# EAGLE board main (EAGLE 7.2.0)
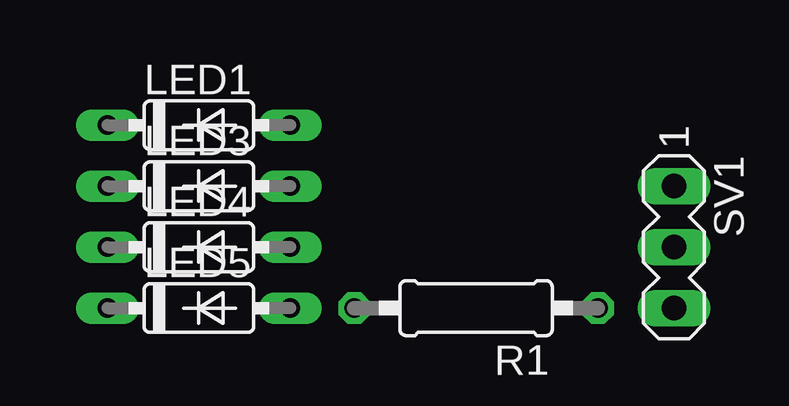
[diagram p0: board, top side]
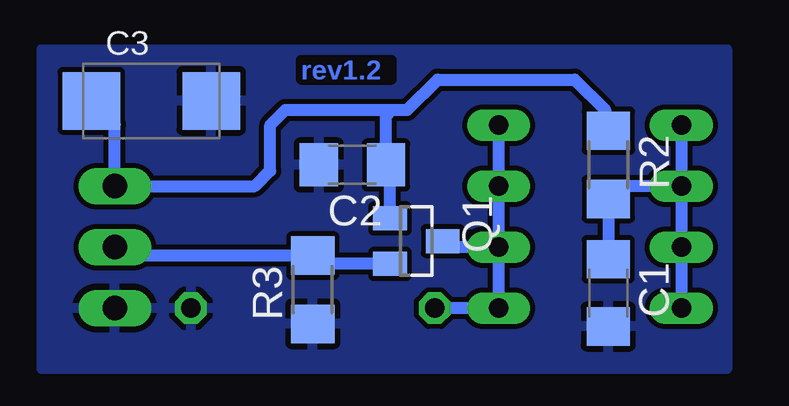
[diagram p1: board, bottom side, seen from below]

No outline drawn. Coordinates in mm, seen from the top.
Copper layers (1*16): Top 0.035mm / dielectric 1.5mm / Bottom 0.035mm
Design rules "default": minimum track width 10mil, minimum drill 24mil, track to track 8mil, track to pad 8mil, pad to pad 8mil, via to via 8mil, smd to smd 8mil, copper to edge 40mil, drill to drill 8mil, minimum pad ring 10mil, minimum via ring 8mil, stop-mask expansion 4mil, vias tented up to drill 0mil, thermal gap 10mil
Net classes: 0 default: width 0.508 mm

## Footprints (pad centres in the part's own frame; a part is rotated, then mirrored left to right if it is on the bottom)
C1206 = smd 1.6 x 1.8: 1 -1.4,0; 2 1.4,0
SMC_C = smd 2.4 x 2.4: + -2.5,0; - 2.5,0
DO35-7 = drill 0.813 long: A 3.81,0; C -3.81,0
SOT23 = smd 1 x 1.4: 1 -0.95,-1.1; 2 0.95,-1.1; 3 0,1.1
0207/10 = drill 0.813 octagon: 1 -5.08,0; 2 5.08,0
R1206 = smd 1.6 x 1.803: 1 -1.422,0; 2 1.422,0
MA03-1 = drill 1.016 long: 1 -2.54,0; 2 0,0; 3 2.54,0

## Placement (x,y rotation side)
C1  100n  [C1206]  7.49,54.61 270 bottom
C2  100n  [C1206]  18.16,59.94 180 bottom
C3  100u  [SMC_C]  26.54,62.61 0 bottom
LED1  1N4148  [DO35-7]  8.26,61.59 0 top
LED3  1N4148  [DO35-7]  8.26,59.05 0 top
LED4  1N4148  [DO35-7]  8.26,56.52 0 top
LED5  1N4148  [DO35-7]  8.26,53.98 0 top
Q1  J111  [SOT23]  15.49,56.77 270 bottom
R1  10M  [0207/10]  19.81,53.98 180 top
R2  1k  [R1206]  7.49,59.94 270 bottom
R3  100k  [R1206]  19.81,54.74 90 bottom
SV1  connector  [MA03-1]  28.07,56.52 270 top

## Library data of the parts
C1-C3 R1-R3 = resistor
LED1 LED3-LED5 = diode
Q1 = transistor-fet
SV1 = con-lstb; OC_FARNELL: unknown; OC_NEWARK: unknown

## Nets
GND: C1.2 C2.2 C3.- R1.1 R3.1 SV1.3
N$1: C1.1 LED1.C LED3.C LED4.C LED5.C R2.2
N$2: Q1.2 R3.2 SV1.2
N$4: LED1.A LED3.A LED4.A LED5.A Q1.3 R1.2
N$6: C2.1 C3.+ Q1.1 R2.1 SV1.1

## Tracks (layer width: path | path; a pad name or v marks a point on that pad's centre or on a via)
GND
  pour Bottom: 2.54,64.77 2.54,51.44 31.11,51.44 31.11,64.77
N$1
  Bottom 0.508: LED1.C LED3.C | LED3.C 6.96,59.05 R2.2 C1.1 | LED3.C LED4.C LED5.C
N$2
  Bottom 0.508: Q1.2 19.47,55.82 R3.2 27.71,56.16 SV1.2
N$4
  Bottom 0.508: R1.2 LED5.A LED4.A | LED1.A LED3.A LED4.A | LED4.A 14.14,56.52 Q1.3
N$6
  Bottom 0.508: Q1.1 16.59,59.78 C2.1 16.76,61.98 16.51,62.23 | 16.51,62.23 20.95,62.23 21.59,61.59 21.59,59.69 22.23,59.05 SV1.1 28.07,61.63 C3.+ | 16.51,62.23 15.88,62.23 14.61,63.5 8.89,63.5 7.62,62.23 7.62,61.49 R2.1

## Text on the board
Bottom: rev1.2